# Altium PCB ESP_Sheild.PcbDoc
Units mm, origin at the board's own origin, x right, y up, seen from the top; angles counter-clockwise.
Board outline 62 x 88 mm, 2 copper layers (Top Layer, Bottom Layer); 15 components, 31 nets, 121 pads, 10 vias.
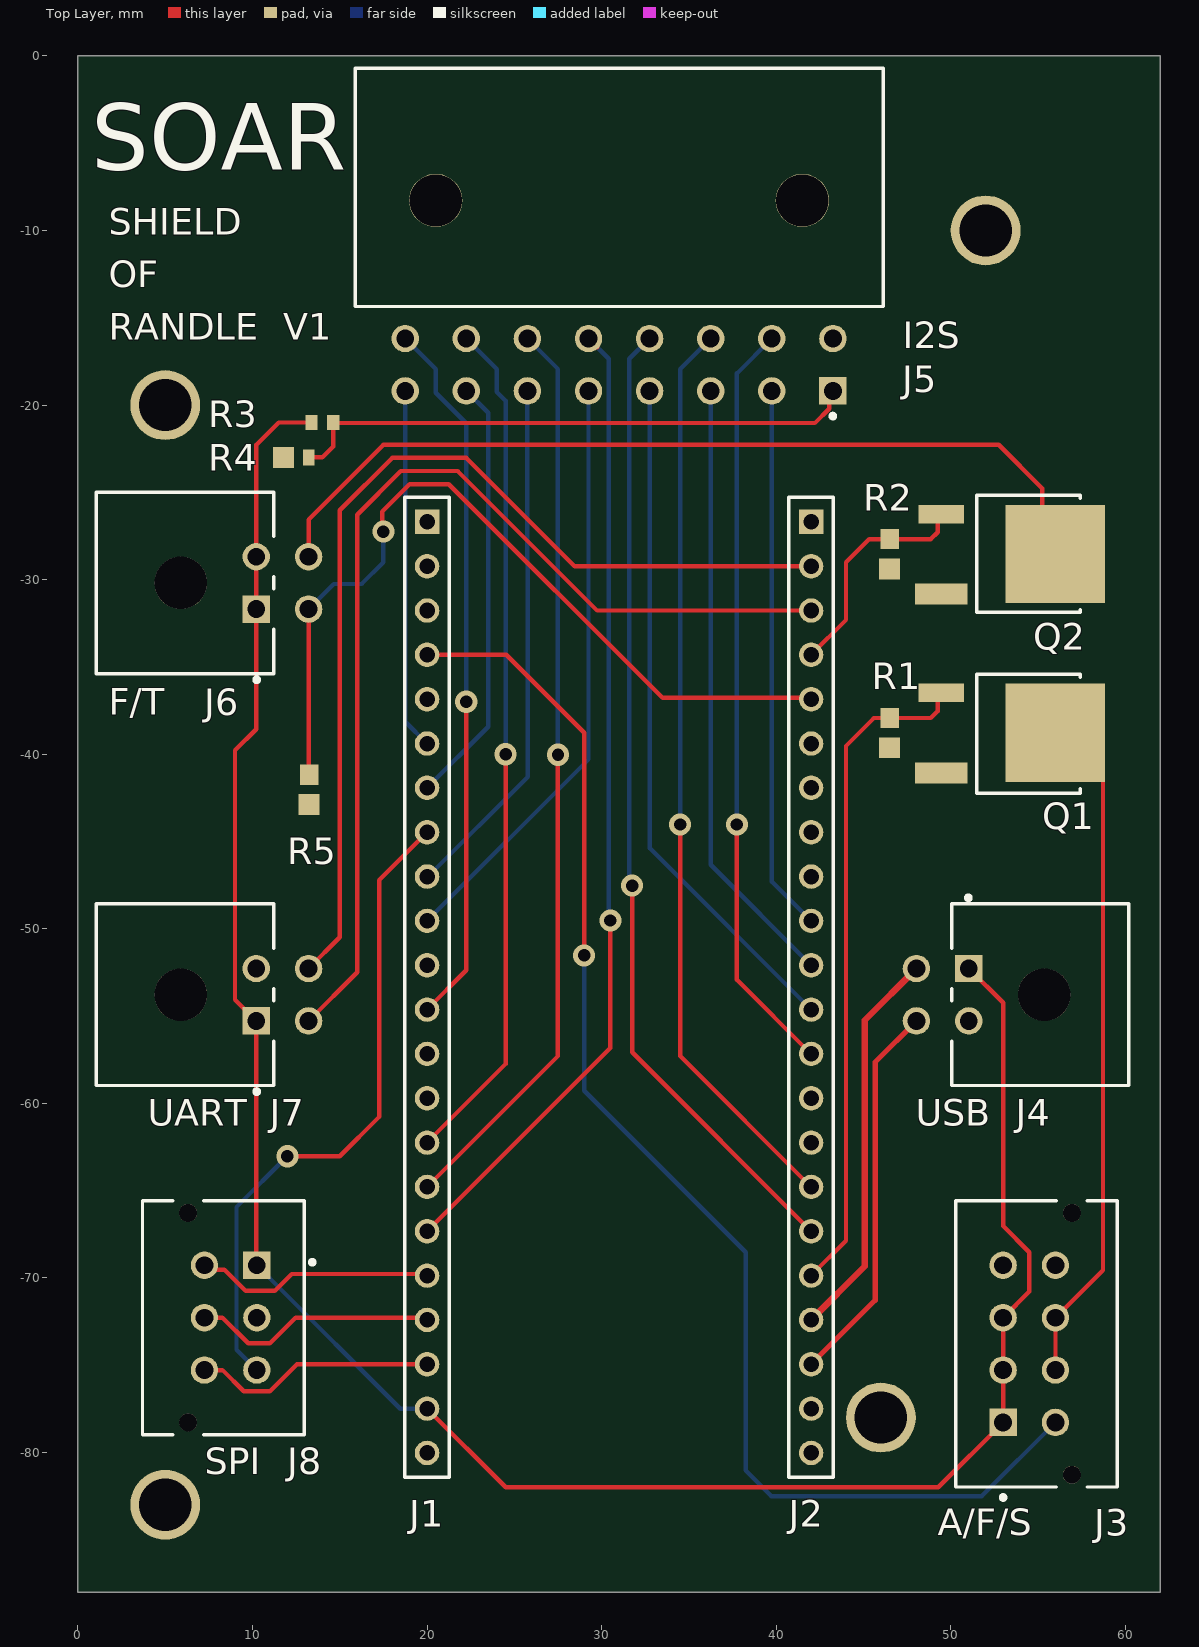
[diagram p0: Top Layer view]
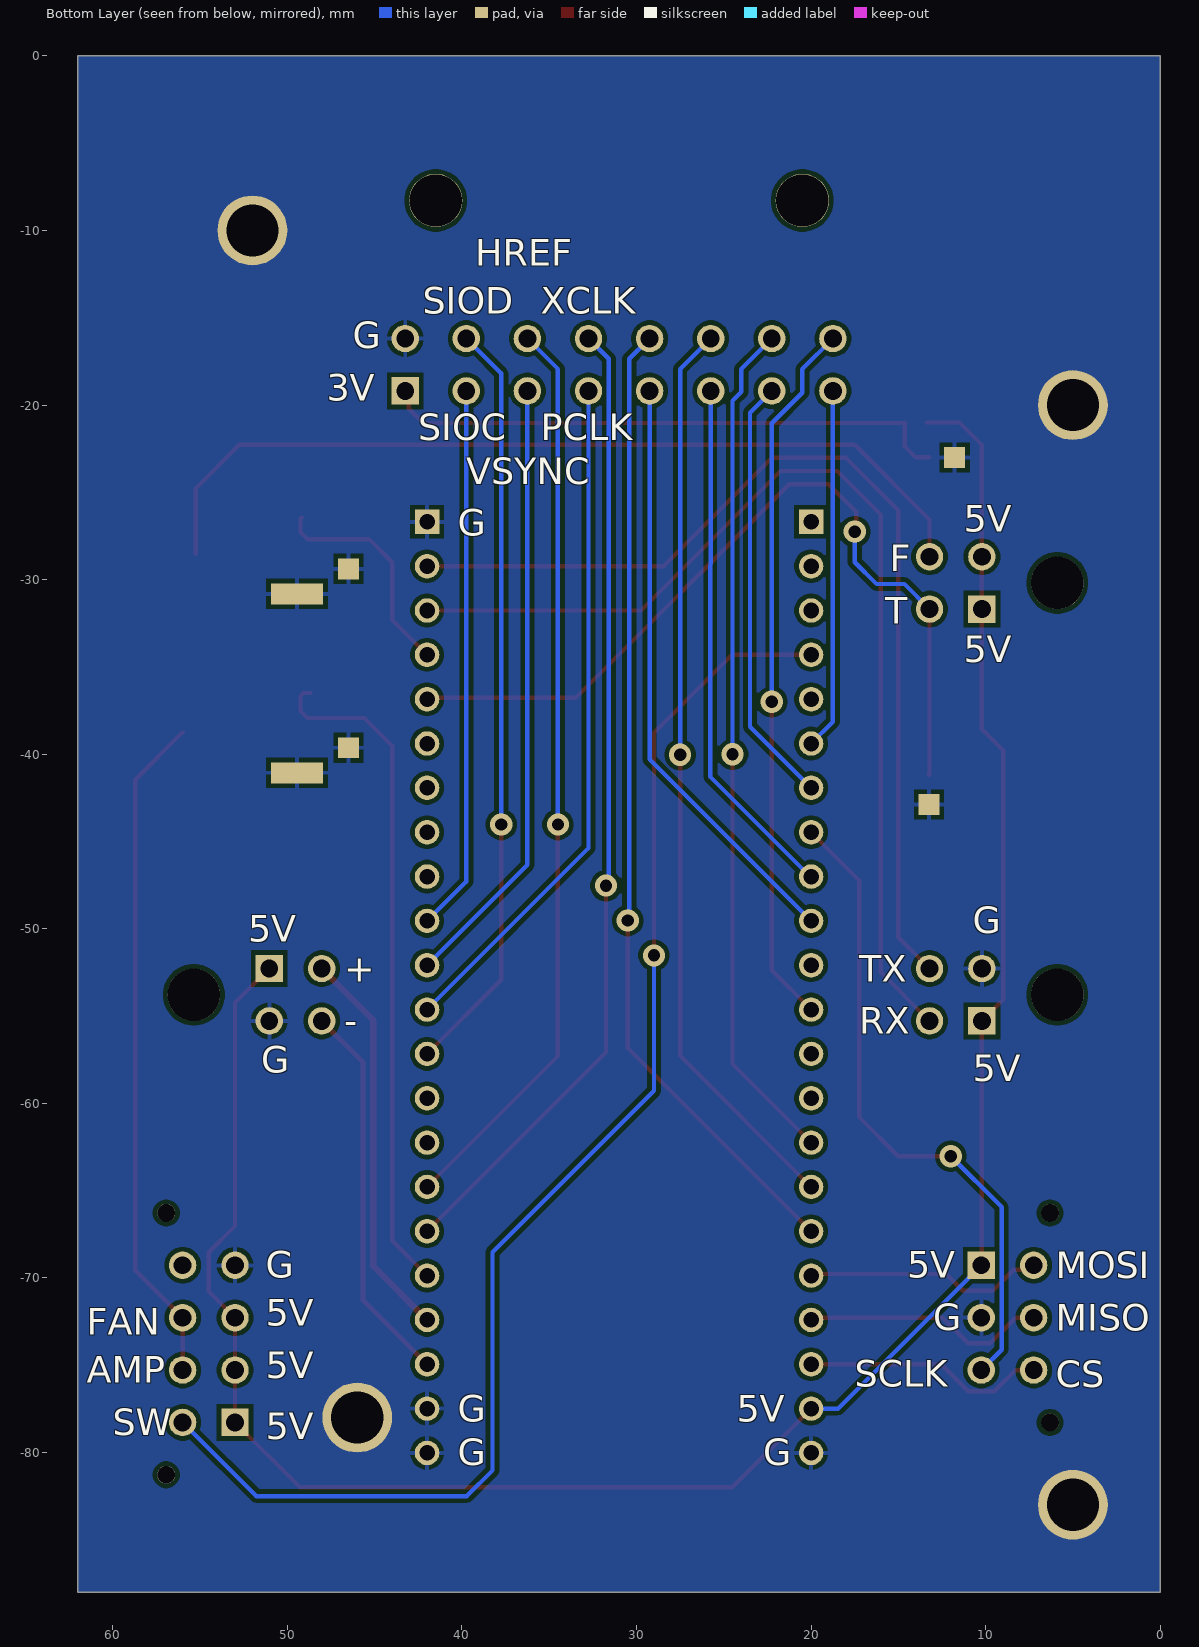
[diagram p1: Bottom Layer view, seen from below]
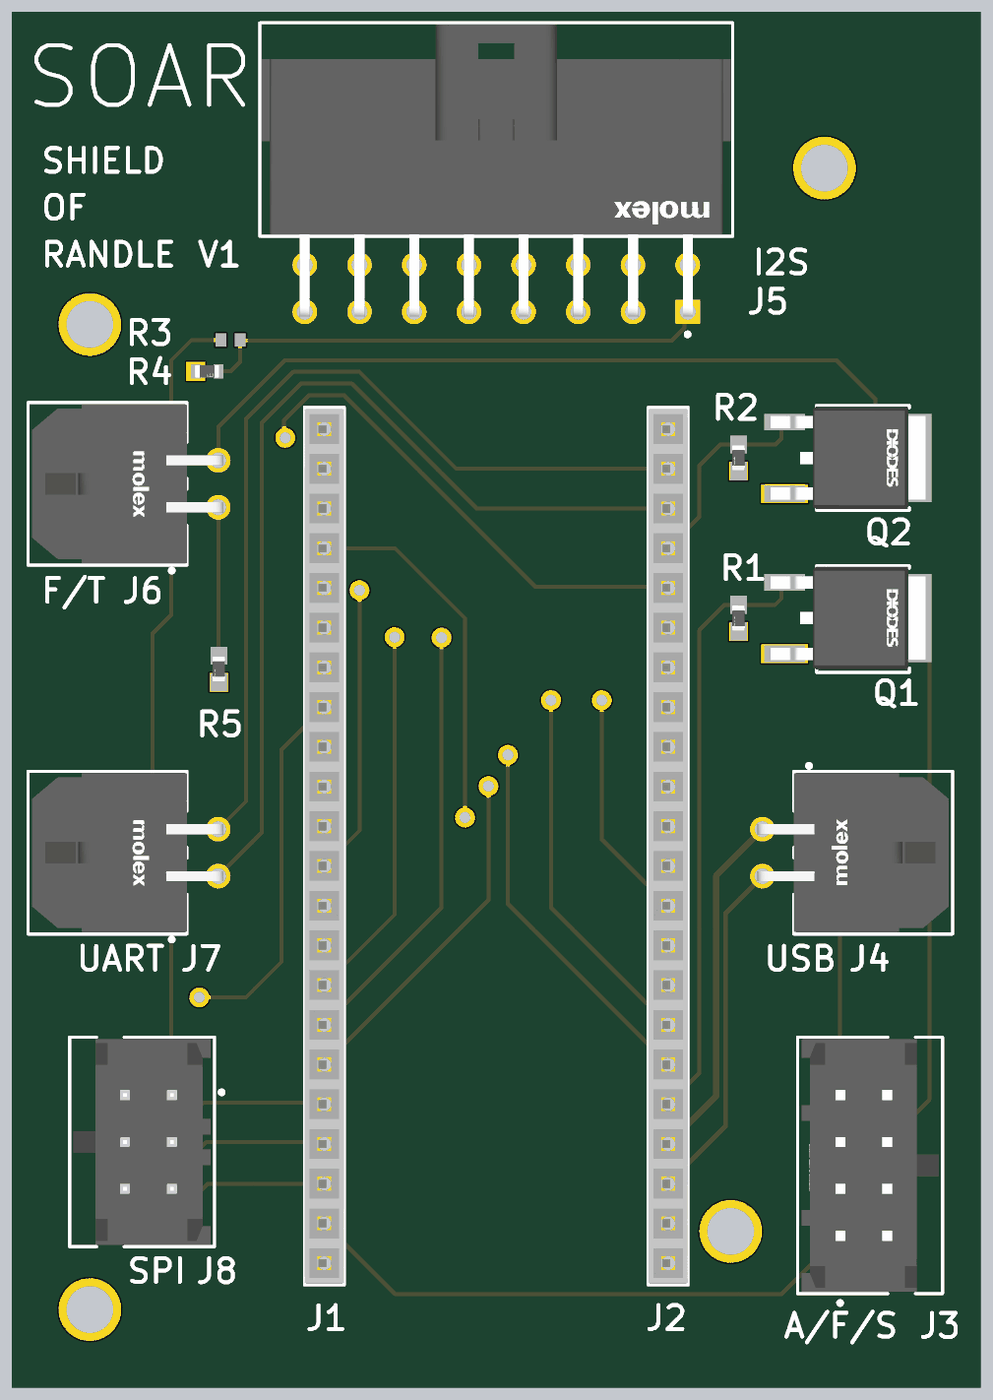
[diagram p2: 3D render of the assembled board from above, using the file's embedded part models]

## Layer stack, top to bottom
Top Solder: solder mask 0.0254, SM-001, Dk 4
Top Layer: signal copper 0.009
Dielectric 1: dielectric 0.32, FR-4, Dk 4.8
Bottom Layer: signal copper 0.009
Bottom Solder: solder mask 0.0254, SM-001, Dk 4

## Board outline
0,-88 62,-88 62,0 0,0

## Design rules (kind name [scope] priority, off if disabled: settings)
Clearance [All] p1: gap=0.254 ignorepadtopadclearanceinfootprint=FALSE except(0: Arc-Hole Track-Hole SMDPad-Hole THPad-Hole Via-Hole Fill-Hole Poly-Hole Region-Hole Text-Hole)
DiffPairsRouting "Schematic Differential Pairs Routing" [InNet('USB_P')] p1: maxlimit=0.254 minlimit=0.254 mostfreqgap=0.254 toplayer_minwidth=0.381 toplayer_maxwidth=0.381 toplayer_prefwidth=0.381 bottomlayer_minwidth=0.381 bottomlayer_maxwidth=0.381 bottomlayer_prefwidth=0.381 maxuncoupledlength=12.7
DiffPairsRouting [All] p2: maxlimit=0.127 minlimit=0.127 mostfreqgap=0.127 toplayer_minwidth=0.303 toplayer_maxwidth=0.303 toplayer_prefwidth=0.303 bottomlayer_minwidth=0.303 bottomlayer_maxwidth=0.303 bottomlayer_prefwidth=0.303 impedanceprofiledriven=TRUE impedanceprofileid={F9CA8915-96FA-4789-BC39-B01CDC3599DC} impedanceprofilevalue=90.000000 maxuncoupledlength=12.7
HoleSize [All] p1: absolutevalues=TRUE maxlimit=5 minlimit=0.025 maxpercent=80.000 minpercent=20.000
PolygonConnect [All] p1: connectstyle=Relief reliefconductorwidth=0.254 reliefentries=4 polygonreliefangle="90 Angle" airgapwidth=0.254
RoutingVias [All] p1: holewidth=0.711 width=1.27 viastyle="Through Hole" minholewidth=0.711 minwidth=1.27 maxholewidth=0.711 maxwidth=1.27
SolderMaskExpansion [All] p1: expansion=0.102 istentingtop=FALSE
Width [All] p1: maxlimit=0.254 minlimit=0.254 preferedwidth=0.254
28 further rules are at their usual default settings.

## Classes and differential pairs
differential pair class USB_LINES: USB
net class USB: USB_N USB_P
differential pair USB: +USB_P -USB_N

## Components (designator, comment, footprint, x,y, rotation, side; value= is the part's Value field where it differs from the comment)
J1 "BCS-122-L-S-TE" SMTC-BCS-122-X-S-TE 20,-26.69 r270 top locked
J2 "BCS-122-L-S-TE" SMTC-BCS-122-X-S-TE 42,-26.69 r270 top locked
J3 "FAN/AMP" FP-43045-0827-0 54.915,-73.78 r270 top (schematic designator J7)
J4 "USB" FP-43045-0400-MFG#1 55,-53.78 r90 top
J5 "I2S" FP-1723161216-MFG 31,-7.53 r180 top (schematic designator J8)
J6 "FAN/TEMP" FP-43045-0400-MFG#2 6.25,-30.19 r270 top (schematic designator J3)
J7 "DMB" FP-43045-0400-MFG#1 6.25,-53.78 r270 top (schematic designator J5)
J8 "SPI" FP-43045-0612-MFG 8.335,-72.28 r90 top (schematic designator J6)
Q1 "DMN6068LK3-13" FP-TO252_DPAK-MFG 53.5,-38.78 r270 top
Q2 "DMN6068LK3-13" FP-TO252_DPAK-MFG 53.5,-28.53 r270 top
R1 "10k" FP-ERJ3G-IPC_A 46.5,-38.78 r90 top
R2 "10k" FP-ERJ3G-IPC_A 46.5,-28.53 r90 top
R3 "2.21K" RESC1608X55X30LL15T15 14,-21 r180 top (schematic designator R4)
R4 "4.7K" FP-RMCF0603-MFG 12.5,-23 r0 top (schematic designator R5)
R5 "10k" FP-ERJ3G-IPC_A 13.25,-42.03 r90 top (schematic designator R3)

## Footprints (in the part's own frame and the unit in brackets; to place one, negate y for a bottom-side part, rotate by r counter-clockwise, add the part's x,y. Pads: shape width x height; smd on the part's side, far side on the other; paste and mask are expansions set on the pad)
FP-43045-0400-MFG#1 [mm]
  rect 1.57x1.57 hole 1.02 paste-1000 mask+0: 1(1.5,3.965)
  round 1.57 hole 1.02 paste-1000 mask+0: 2(-1.5,3.965) 3(1.5,6.965) 4(-1.5,6.965)
  round 3 hole 2.998 unplated paste-1000 mask+0: ""(0,-0.355)
  silkscreen extent -5.2,-5.21 5.67,4.95, body extent -5.3,-5.31 5.3,7.85, height 0.25
FP-43045-0400-MFG#2 [mm]
  rect 1.57x1.57 hole 1.02 paste-1000 mask+0: 1(1.5,3.965)
  round 1.57 hole 1.02 paste-1000 mask+0: 2(-1.5,3.965) 3(1.5,6.965) 4(-1.5,6.965)
  round 3 hole 3 unplated paste-1000 mask+0: ""(0,-0.355)
  silkscreen extent -5.2,-5.21 5.67,4.95, body extent -5.3,-5.31 5.3,7.85, height 0.25
FP-43045-0612-MFG [mm]
  rect 1.57x1.57 hole 1.02 paste-1000 mask+0: 1(3,-1.915)
  round 1.57 hole 1.02 paste-1000 mask+0: 2(0,-1.915) 3(-3,-1.915) 4(3,1.085) 5(0,1.085) 6(-3,1.085)
  round 1.02 hole 1.02 unplated paste-1000 mask+0: ""(-6,2.025) ""(6,2.025)
  silkscreen extent -6.7,-5.22 6.7,4.63, body extent -6.8,-4.73 6.8,4.73, height 0.25
FP-43045-0827-0 [mm]
  rect 1.57x1.57 hole 1.02 paste-1000 mask+0: 1(4.5,-1.915)
  round 1.57 hole 1.02 paste-1000 mask+0: 2(1.5,-1.915) 3(-1.5,-1.915) 4(-4.5,-1.915) 5(4.5,1.085) 6(1.5,1.085) 7(-1.5,1.085) 8(-4.5,1.085)
  round 1.02 hole 1.02 unplated paste-1000 mask+0: ""(-7.5,2.025) ""(7.5,2.025)
  silkscreen extent -8.2,-4.63 8.92,4.63, body extent -8.3,-4.73 8.3,4.73, height 0.25
FP-1723161216-MFG [mm]
  rect 1.57x1.57 hole 1.02 paste-1000 mask+0: 1(-12.25,11.66)
  round 1.57 hole 1.02 paste-1000 mask+0: 2(-8.75,11.66) 3(-5.25,11.66) 4(-1.75,11.66) 5(1.75,11.66) 6(5.25,11.66) 7(8.75,11.66) 8(12.25,11.66) 9(-12.25,8.66) 10(-8.75,8.66) 11(-5.25,8.66) 12(-1.75,8.66) 13(1.75,8.66) 14(5.25,8.66) 15(8.75,8.66) 16(12.25,8.66)
  round 3.05 hole 2.998 unplated paste-1000 mask+0: ""(-10.5,0.75) ""(10.5,0.75)
  silkscreen extent -15.12,-6.83 15.12,13.23, body extent -15,-6.7 15,11.98, height 13.81
FP-ERJ3G-IPC_A [mil]
  rect 45.53x41.82 smd paste+0 mask+0: 1(-33.5,0) 2(33.5,0)
  body extent -76,-41 76,41, height 10
FP-RMCF0603-MFG [mm]
  rect 0.65x0.9 smd paste+0 mask+0: 1(-0.725,0) 2(0.725,0)
  body extent -0.77,-0.4 0.77,0.4, height 0.55
FP-TO252_DPAK-MFG [mm]
  rect 1.06x2.6 smd paste+0 mask+0: 1(-2.286,-4.05) 3(2.286,-4.05)
  rect 5.632x5.7 smd paste+0 mask+0: 4(0,2.5)
  silkscreen extent -3.35,-2 3.47,3.93, body extent -3.45,-5.45 3.45,5.45, height 0.25
RESC1608X55X30LL15T15 [mm] "Chip Resistor, 2-Leads, Body 1.60x0.80mm, IPC High Density"
  rect 0.7x0.85 smd: 1(-0.625,0) 2(0.625,0)
  body extent -0.87,-0.48 0.87,0.48, height 0.55
SMTC-BCS-122-X-S-TE [mm] "Box Connector Socket Strip, 1x22 Pins, Vertical, 2.54mm Pitch, Female"
  rect 1.4x1.4 hole 0.89: 1(0,0)
  round 1.4 hole 0.89: 2(2.54,0) 3(5.08,0) 4(7.62,0) 5(10.16,0) 6(12.7,0) 7(15.24,0) 8(17.78,0) 9(20.32,0) 10(22.86,0) 11(25.4,0) 12(27.94,0) 13(30.48,0) 14(33.02,0) 15(35.56,0) 16(38.1,0) 17(40.64,0) 18(43.18,0) 19(45.72,0) 20(48.26,0) 21(50.8,0) 22(53.34,0)
  silkscreen extent -1.4,-1.27 54.74,1.27, body extent -1.27,-1.27 54.61,1.27, height 7.37

## Part data
J1 J2: library part CMP-00011-1, "Conn Socket Strip SKT 22 POS 2.54mm Solder ST Thru-Hole Tube", Color=Black, Contact Resistance=10mR, Max Current Rating=5.9A, Max Operating Temperature=125°C, Max Voltage Rating (AC)=475V, Min Operating Temperature=-55°C, Package Quantity=1, Connector Type=Receptacle, Contact Material=Bronze, Contact Plating=Gold, Depth=2.54mm, Gender=Receptacle, Housing Color=Black, Housing Material=Polymer, Lead Free="Lead Free", Length=55.88mm, Mount="Through Hole", Number of Contacts=22, Number of Positions=22, Number of Rows=1, Orientation=Vertical, Packaging=Bulk, Pitch=2.54mm, Radiation Hardening=No, REACH SVHC="No SVHC", RoHS Compliant=Yes, Series="Tiger Claw™ BCS", Termination=Solder, Voltage Rating=475V
J3: library part CMP-04776-000339-1, "CONN HEADER VERT 8POS 3MM", Current Rating=5A, Package Quantity=1440, Voltage Rating=250V, Contact Material=Brass, Contact Plating=Tin, Gender=Male, Glow Wire Compliant=Compliant, Halogen Free="Low Halogen", Housing Material=Thermoplastic, Number of Circuits=8, Number of Contacts=8, Number of Positions=8, Number of Rows=2, Orientation=Vertical, Packaging=Tray, Pitch=3mm, Radiation Hardening=No, RoHS Compliant=Yes, Row Spacing=3mm, Series=43045, Termination="Through Hole"
J4: library part CMP-04776-000002-1, "CONN HEADER R/A 4POS 3MM", Current Rating=8.5A, Manufacturer=Molex, Manufacturer Part Number=43045-0400, Temperature="-40°C to +105°C", Temperature Range High=+105°C, Temperature Range Low=-40°C, Voltage Rating=600V, Automotive=No, Category=Conn, ComponentLink2Description=Datasheet, ComponentLink2URL=https://www.molex.com/webdocs/datasheets/pdf/en-us/0430450400_PCB_HEADERS.pdf, Conn Gender=Male, Conn Orientation="Right Angle", Contact Material=Tin,Nickel, Device Class L1=Connectors, Device Class L2="Headers and Wire Housings", Device Class L3=unset, Digikey Description="CONN HEADER R/A 4POS 3MM", Footprint Url=https://www.molex.com/pdm_docs/sd/430450400_sd.pdf, Height=9.27mm, Is Female=yes, Lead Free=Yes, Number of Contacts=4, Number of Rows=2, Octopart=https://octopart.com/43045-0400-molex-287063, Package=43045-0400, Pitch=3mm, RoHS=TRUE
J5: library part CMP-04776-000044-1, "CONN HEADER R/A 16POS 3.5MM", Current Rating=11A, Manufacturer=Molex, Manufacturer Part Number=1723161216, Temperature="-40°C to +120°C", Temperature Range High=+120°C, Temperature Range Low=-40°C, Voltage Rating=400V, Automotive=No, Category=Conn, ComponentLink2Description=Datasheet, ComponentLink2URL=https://www.molex.com/webdocs/datasheets/pdf/en-us/1723161216_PCB_HEADERS.pdf, Conn Gender=Male, Conn Orientation="Right Angle", Contact Material=Gold,Nickel, Device Class L1=Connectors, Device Class L2="Headers and Wire Housings", Device Class L3=unset, Digikey Description="CONN HEADER R/A 16POS 3.5MM", Footprint Url=https://www.molex.com/pdm_docs/sd/1723161216_sd.pdf, Height=13.81mm, Lead Free=Yes, Mouser Description="Ultra-Fit Right Angle Header, 3.50mm Pitch, Dual Row, 16 Circuits,", Number of Contacts=16, Number of Rows=2, Octopart=https://octopart.com/172316-1216-molex-60760060, Package=1723161216, Pitch=3.5mm, RoHS=TRUE, Standoff Height=0.05mm
J6: library part CMP-04776-000002-1, "CONN HEADER R/A 4POS 3MM /  / FAN/THERMISISTOR", Current Rating=8.5A, Manufacturer=Molex, Manufacturer Part Number=43045-0400, Temperature="-40°C to +105°C", Temperature Range High=+105°C, Temperature Range Low=-40°C, Voltage Rating=600V, Automotive=No, Category=Conn, ComponentLink2Description=Datasheet, ComponentLink2URL=https://www.molex.com/webdocs/datasheets/pdf/en-us/0430450400_PCB_HEADERS.pdf, Conn Gender=Male, Conn Orientation="Right Angle", Contact Material=Tin,Nickel, Device Class L1=Connectors, Device Class L2="Headers and Wire Housings", Device Class L3=unset, Digikey Description="CONN HEADER R/A 4POS 3MM", Footprint Url=https://www.molex.com/pdm_docs/sd/430450400_sd.pdf, Height=9.27mm, Is Female=yes, Lead Free=Yes, Number of Contacts=4, Number of Rows=2, Octopart=https://octopart.com/43045-0400-molex-287063, Package=43045-0400, Pitch=3mm, RoHS=TRUE
J7: library part CMP-04776-000002-1, "CONN HEADER R/A 4POS 3MM /  / DMB UART", Current Rating=8.5A, Manufacturer=Molex, Manufacturer Part Number=43045-0400, Temperature="-40°C to +105°C", Temperature Range High=+105°C, Temperature Range Low=-40°C, Voltage Rating=600V, Automotive=No, Category=Conn, ComponentLink2Description=Datasheet, ComponentLink2URL=https://www.molex.com/webdocs/datasheets/pdf/en-us/0430450400_PCB_HEADERS.pdf, Conn Gender=Male, Conn Orientation="Right Angle", Contact Material=Tin,Nickel, Device Class L1=Connectors, Device Class L2="Headers and Wire Housings", Device Class L3=unset, Digikey Description="CONN HEADER R/A 4POS 3MM", Footprint Url=https://www.molex.com/pdm_docs/sd/430450400_sd.pdf, Height=9.27mm, Is Female=yes, Lead Free=Yes, Number of Contacts=4, Number of Rows=2, Octopart=https://octopart.com/43045-0400-molex-287063, Package=43045-0400, Pitch=3mm, RoHS=TRUE
J8: library part CMP-04776-000333-1, "CONN HEADER VERT 6POS 3MM", Case/Package=0612, Color=Black, Contact Resistance=10mR, Current Rating=5A, Flammability Rating="UL94 V-0", Max Operating Temperature=105°C, Max Voltage Rating (DC)=250.25kV, Min Operating Temperature=-40°C, Package Quantity=1728, Voltage Rating=250V, Approvals=UL, Contact Material=Brass, Contact Plating=Tin, Depth=8.77mm, Diameter=3mm, Gender=Male, Glow Wire Compliant=Compliant, Halogen Free="Low Halogen", Height=9.91mm, Housing Color=Black, Housing Material=Polymer, Lead Free="Lead Free", Length=13.15mm, Material=Thermoplastic, Max Current Rating=5A, Mount="Through Hole", Number of Circuits=6, Number of Contacts=6, Number of Ports=1, Number of Positions=6, Number of Rows=2, Number of Terminals/Pins=6, Orientation=Vertical, Packaging=Tray, Pitch=3mm, Radiation Hardening=No, RoHS Compliant=Yes, Row Spacing=3mm, Series=43045, Termination=Solder
Q1 Q2: library part CMP-00012-1, "VDS=60V VGS=±20V ID=8.5A P=2.12W", Case/Package=TO-252-3, Continuous Drain Current (ID)=8.5A, Drain to Source Breakdown Voltage=60V, Drain to Source Resistance=68mR, Gate to Source Voltage (Vgs)=20V, Input Capacitance=502pF, Max Operating Temperature=150°C, Max Power Dissipation=2.12W, Min Operating Temperature=-55°C, Package Quantity=2500, Drain to Source Voltage (Vdss)=60V, Element Configuration=Single, Fall Time=8.7ns, Height=2.39mm, Lead Free="Lead Free", Length=6.73mm, Mount="Surface Mount", Number of Channels=1, Number of Elements=1, Number of Pins=3, Packaging="Tape and Reel", Polarity=N-CHANNEL, Rds On Max=68mR, REACH SVHC="No SVHC", Rise Time=10.8ns, Series=-, Turn-Off Delay Time=11.9ns, Turn-On Delay Time=3.6ns, Weight=0.139332oz, Width=6.22mm
R1 R2 R5: library part CMP-00016-1, "贴片电阻 10KΩ ±5% 1/10W ±200ppm/℃ 0603", Case Code (Imperial)=0603, Case Code (Metric)=1608, Max Operating Temperature=155°C, Max Power Dissipation=100mW, Min Operating Temperature=-55°C, Package Quantity=1, Resistance=10kR, Resistance Tolerance=5%, Resistor Type="Thick Film", Temperature Coefficient=200ppm/°C, Voltage Rating=75V, Voltage Rating (DC)=50V, Case/Package=0603, Construction=Rectangular, Contact Plating=Tin, Depth=0.8mm, Features="Automotive AEC-Q200", Height=0.45mm, Lead Free="Lead Free", Length=1.6mm, Military Standard=Not, Mount="Surface Mount", Number of Terminations=2, Packaging="Tape and Reel", Power Rating=100mW, REACH SVHC="No SVHC", RoHS Compliant=Yes, Series=ERJ, Technology="THICK FILM", Termination=SMD/SMT, Tolerance=5%, Weight=7.1E-05oz, Width=0.8mm, Working Voltage=75V
R3: library part CMP-00021-1, "Res Thick Film 0603 2.21K Ohm 1% 1/10W +/-100ppm/ßC Molded SMD Punched Carrier T/R", Case Code (Imperial)=0603, Case Code (Metric)=1608, Max Operating Temperature=155°C, Max Power Dissipation=100mW, Min Operating Temperature=-55°C, Package Quantity=1, Resistance=2.21kR, Resistance Tolerance=1%, Resistor Type="Thick Film", Temperature Coefficient=100ppm/°C, Voltage Rating=75V, Voltage Rating (DC)=50V, Case/Package=0603, Construction=Rectangular, Contact Plating=Tin, Depth=0.8mm, Features="Automotive AEC-Q200", Height=0.45mm, Lead Free="Lead Free", Length=1.6mm, Military Standard=Not, Mount="Surface Mount", Number of Terminations=2, Packaging="Tape and Reel", Power Rating=100mW, Radiation Hardening=No, REACH SVHC="No SVHC", RoHS Compliant=Yes, Series=ERJ, Size Code=0603, Technology="THICK FILM", Termination=SMD/SMT, Tolerance=1%, Width=0.8mm
R4: library part CMP-00014-1, "Resistor Thick Film 0603 4.7K Ohm 1% 1/10W ±100ppm/°C Molded SMD SMD Paper T/R", Case Code (Imperial)=0603, Case Code (Metric)=1608, Max Operating Temperature=155°C, Max Power Dissipation=100mW, Min Operating Temperature=-55°C, Resistance=4.7kR, Resistor Type="Thick Film", Temperature Coefficient=100ppm/°C, Tolerance=1%, Case/Package=0603, Construction=Rectangular, Contact Plating=Tin,Matte, Depth=0.8mm, Features="Automotive AEC-Q200", Height=0.022inch, Lead Free="Lead Free", Length=0.061inch, Military Standard=Not, Mount="Surface Mount", Number of Terminations=2, Packaging="Tape and Reel", Power Rating=100mW, Radiation Hardening=No, RoHS Compliant=Yes, Series=RMCF, Width=0.031inch

## Free pads (board coordinates)
  rect 1.2x1.2 all layers, no hole: 2(11.775,-23) 3(13.25,-42.881) 4(46.5,-39.631) 5(46.5,-29.381)
  rect 3x1.2 all layers, no hole: 6(49.45,-30.816) 7(49.45,-41.066)
  round 4 hole 2.998: 9(5,-83)
  round 4 hole 2.998 mask+0.1: 10(5,-20) 11(52,-10) 13(46,-78)

## Via types
v1: diameter 1.27, hole 0.711, Top Layer to Bottom Layer, 10 vias

## Nets (pads, with @x,y where several pads share a name; then routed paths per layer and width w, separated by ;. In a path a pad name is that pad's centre, name@x,y a point inside that pad or via, vN(x,y) a via of type N, cw(c..) or ccw(c..) an arc to the next point about the centre after c; other vN are vias at no path point)
3.4V: J5.1 R3.1 R4.2 | length 33.5
  Top Layer w0.254: R4.2 14,-23 14.625,-22.375 R3.1 14.655,-21.03 42.22,-21.03 43.043,-20.207 43.043,-19.397 J5.1 J5.1@42.823,-19.617
+5: J1.21 J3.1 J3.2 J3.3 J4.1 J6.1 J6.2 J7.1 J8.1 R3.2 | length 129.3
  Top Layer w0.254: J8.1 10.215,-69.245 J7.1 9,-54.065 9,-39.78 10.215,-38.565 J6.1 J6.2 10.215,-22.285 11.5,-21 R3.2 ; J1.21 24.51,-82 49.28,-82 J3.1 J3.2 J3.3 54.5,-70.78 54.5,-68.53 53,-67.03 53,-54.245 J4.1
  Bottom Layer w0.254: J8.1 11,-70.03 18.46,-77.49 J1.21
FAN: J6.4 Q2.4 | length 50.7
  Top Layer w0.254: J6.4 13.215,-26.565 17.5,-22.28 52.75,-22.28 55.25,-24.78 Q2.4@55.25,-28.53
FAN-CTRL: J2.4 Q2.1 R2.2 | length 13
  Top Layer w0.254: J2.4 44,-32.31 44,-29.009 45.33,-27.679 R2.2 48.851,-27.679 49.25,-27.28 49.25,-26.52 Q2.1@49.175,-26.446
FAN/AMP: J3.6 J3.7 Q1.4 | length 38.8
  Top Layer w0.254: J3.6 J3.7 58.723,-69.557 58.723,-41.469 56.034,-38.78 Q1.4
FAN/AMP-CTRL: J2.18 Q1.1 R1.2 | length 38.7
  Top Layer w0.254: J2.18 44,-67.87 44,-39.53 45.601,-37.929 R1.2 48.851,-37.929 49.25,-37.53 49.25,-36.679 49.065,-36.494 Q1.1@48.68,-36.494
GND: J1.22 J2.1 J2.21 J2.22 J3.4 J4.2 J5.9 J7.2 J8.2 pad.2 pad.3 pad.4 pad.5 pad.6 pad.7 pad.9 pad.10 pad.11 pad.13 Q1.3 Q2.3 R1.1 R2.1 R4.1 R5.1 | length 3.6
  Top Layer w0.254: J7.2 J7.2@10.215,-52.201 ; J2.1 J2.1@42.084,-26.606 ; J5.9@42.998,-16.442 J5.9 ; pad.7@49.075,-41.03 pad.7@49.092,-41.047 ; pad.7@49.25,-40.866 pad.7 pad.7@50.22,-41.066 ; pad.7@50.623,-41.469 pad.7@50.22,-41.066 ; pad.7@50.623,-40.663 pad.7@50.22,-41.066
  Bottom Layer w0.254: J2.1 J2.1@42.573,-27.263
I2S-HREF: J2.16 J5.11 | length 52.4
  Top Layer w0.254: v1(34.5,-44.03) 34.5,-57.29 J2.16
  Bottom Layer w0.254: v1(34.5,-44.03) 34.5,-17.94 J5.11
I2S-PCLK: J2.12 J5.4 | length 39.3
  Bottom Layer w0.254: J5.4 32.75,-45.38 J2.12
I2S-SIOC: J2.10 J5.2 | length 31.3
  Bottom Layer w0.254: J5.2 39.75,-47.3 J2.10
I2S-SIOD: J2.13 J5.10 | length 43.6
  Top Layer w0.254: v1(37.75,-44.03) 37.75,-52.92 J2.13
  Bottom Layer w0.254: v1(37.75,-44.03) 37.75,-18.19 J5.10
I2S-VSYNC: J2.11 J5.3 | length 35.3
  Bottom Layer w0.254: J5.3 36.25,-46.34 J2.11
I2S-XCLK: J2.17 J5.12 | length 55.9
  Top Layer w0.254: v1(31.75,-47.53) 31.75,-57.08 J2.17
  Bottom Layer w0.254: v1(31.75,-47.53) 31.584,-47.364 31.584,-17.356 J5.12
I2S-Y2: J1.12 J5.16 | length 40.8
  Top Layer w0.254: J1.12 22.25,-52.38 v1(22.25,-37)
  Bottom Layer w0.254: J5.16 20.5,-17.94 20.5,-19.291 22.25,-21.041 v1(22.25,-37)
I2S-Y3: J1.6 J5.8 | length 20.7
  Bottom Layer w0.254: J5.8 18.75,-38.14 J1.6
I2S-Y4: J1.15 J5.15 | length 48.9
  Top Layer w0.254: J1.15 24.5,-57.75 v1(24.5,-40)
  Bottom Layer w0.254: J5.15 24,-17.94 24,-19.25 24.5,-19.75 v1(24.5,-40)
I2S-Y5: J1.7 J5.7 | length 24.7
  Bottom Layer w0.254: J1.7 23.5,-38.43 23.5,-20.44 J5.7
I2S-Y6: J1.16 J5.14 | length 52.4
  Top Layer w0.254: J1.16 27.5,-57.29 v1(27.5,-40.03)
  Bottom Layer w0.254: J5.14 27.5,-17.94 v1(27.5,-40.03)
I2S-Y7: J1.9 J5.6 | length 30.2
  Bottom Layer w0.254: J1.9 20.061,-47.01 25.766,-41.305 25.766,-39.109 J5.6
I2S-Y8: J1.17 J5.13 | length 56.7
  Top Layer w0.254: J1.17 30.5,-56.83 v1(30.5,-49.53) ; J5.13 29.676,-16.616 J5.13@29.75,-16.69
  Bottom Layer w0.254: J5.13 30.416,-17.356 30.416,-49.446 v1(30.5,-49.53)
I2S-Y9: J1.10 J5.5 | length 34.2
  Bottom Layer w0.254: J1.10 29.25,-40.3 J5.5
SPI-CS: J1.20 J8.6 | length 13.9
  Top Layer w0.254: J8.6 8.28,-75.28 9.5,-76.5 11,-76.5 12.55,-74.95 J1.20
SPI-MISO: J1.19 J8.5 | length 14.3
  Top Layer w0.254: J8.5 8.28,-72.28 9.75,-73.75 11,-73.75 12.47,-72.28 19.87,-72.28 J1.19
  Bottom Layer w0.254: J8.5 J8.5@7.25,-72.03
SPI-MOSI: J1.18 J8.4 | length 13.8
  Top Layer w0.254: J8.4 7.502,-69.532 8.393,-69.532 9.611,-70.75 11.28,-70.75 12.25,-69.78 19.91,-69.78 J1.18
SPI-SCLK: J1.8 J8.3 | length 38
  Top Layer w0.254: J8.3 J8.3@10.445,-75.085 ; v1(12,-63.03) 15,-63.03 17.25,-60.78 17.25,-47.22 J1.8 J1.8@19.837,-44.47
  Bottom Layer w0.254: J8.3 9.084,-74.114 9.084,-65.946 v1(12,-63.03)
SWITCH: J1.4 J3.5 | length 77
  Top Layer w0.254: J1.4 24.53,-34.31 29,-38.78 v1(29,-51.53)
  Bottom Layer w0.254: v1(29,-51.53) 29,-59.28 38.25,-68.53 38.25,-81.03 39.72,-82.5 51.78,-82.5 J3.5
TEMP: J2.5 J6.3 R5.2 | length 48.2
  Top Layer w0.254: J6.3 13.215,-41.144 R5.2 ; v1(17.5,-27.25) 17.423,-27.173 17.423,-26.107 19,-24.53 21.25,-24.53 33.5,-36.78 41.93,-36.78 J2.5
  Bottom Layer w0.254: J6.3 14.655,-30.25 16.25,-30.25 17.5,-29 v1(17.5,-27.25)
"UART RX": J2.3 J7.3 | length 60.5
  Top Layer w0.254: J7.3 16,-52.495 16,-26.28 18.5,-23.78 21.75,-23.78 29.74,-31.77 J2.3
"UART TX": J2.2 J7.4 | length 57.8
  Top Layer w0.254: J7.4 15,-50.495 15,-26.03 18,-23.03 22.25,-23.03 28.45,-29.23 J2.2
USB_N: J2.20 J4.4 | length 22.2
  Top Layer w0.303: J2.20 45.668,-71.282 45.668,-57.647 J4.4
USB_P: J2.19 J4.3 | length 22.6
  Top Layer w0.381: J2.19 45.072,-69.339 45.072,-55.244 J4.3
pads on no net: J1.1 J1.2 J1.3 J1.5 J1.11 J1.13 J1.14 J2.6 J2.7 J2.8 J2.9 J2.14 J2.15 J3. J3.8 J4. J5. J6. J7. J8.

## Polygon pours and split planes (outlines as drawn)
GND on Bottom Layer "GND_L02_P001" (solid, pour order 1): 62,-88 0,-88 0,0 62,0 62,-88

## Silkscreen, mask and mechanical layers (free items; w line width, h text height)
Top Overlay:
  text "SOAR" at 0.75,-6.53 h3.8
  text "SHIELD" at 1.754,-10.246 h1.52
  text "OF" at 1.754,-13.246 h1.52
  text "RANDLE" at 1.754,-16.246 h1.52
  text "V1" at 11.754,-16.246 h1.52
  text "I2S" at 47.254,-16.746 h1.52
  text "F/T" at 1.754,-37.746 h1.52
  text "UART" at 4.004,-61.276 h1.52
  text "USB" at 48.004,-61.276 h1.52
  text "SPI" at 7.254,-81.246 h1.52
  text "A/F/S" at 49.254,-84.746 h1.52
Bottom Overlay:
  text "HREF" at 39.246,-12.026 h1.52
  text "XCLK" at 35.496,-14.776 h1.52
  text "SIOD" at 42.246,-14.776 h1.52
  text "G" at 46.246,-16.746 h1.52
  text "3V" at 47.746,-19.746 h1.52
  text "PCLK" at 35.496,-22.026 h1.52
  text "SIOC" at 42.496,-22.026 h1.52
  text "VSYNC" at 39.746,-24.526 h1.52
  text "5V" at 11.246,-27.246 h1.52
  text "G" at 40.246,-27.496 h1.52
  text "F" at 15.496,-29.526 h1.52
  text "T" at 15.746,-32.526 h1.52
  text "5V" at 11.246,-34.746 h1.52
  text "G" at 10.746,-50.246 h1.52
  text "5V" at 52.246,-50.746 h1.52
  text "TX" at 17.246,-53.026 h1.52
  text "+" at 46.746,-53.03 h1.52
  text "-" at 46.746,-56.008 h1.52
  text "RX" at 17.246,-56.026 h1.52
  text "G" at 51.496,-58.246 h1.52
  text "5V" at 10.746,-58.746 h1.52
  text "5V" at 14.496,-69.996 h1.52
  text "G" at 51.246,-69.996 h1.52
  text "MOSI" at 5.996,-70.026 h1.52
  text "5V" at 51.246,-72.746 h1.52
  text "G" at 12.996,-72.996 h1.52
  text "MISO" at 5.996,-73.026 h1.52
  text "FAN" at 61.496,-73.246 h1.52
  text "5V" at 51.246,-75.746 h1.52
  text "AMP" at 61.496,-75.996 h1.52
  text "SCLK" at 17.496,-76.246 h1.52
  text "CS" at 5.996,-76.276 h1.52
  text "5V" at 24.246,-78.246 h1.52
  text "G" at 40.246,-78.246 h1.52
  text "SW" at 59.996,-79.026 h1.52
  text "5V" at 51.246,-79.246 h1.52
  text "G" at 22.746,-80.746 h1.52
  text "G" at 40.246,-80.746 h1.52